# EAGLE board brick_serial_bluetooth_RN42 (EAGLE 7.4.0)
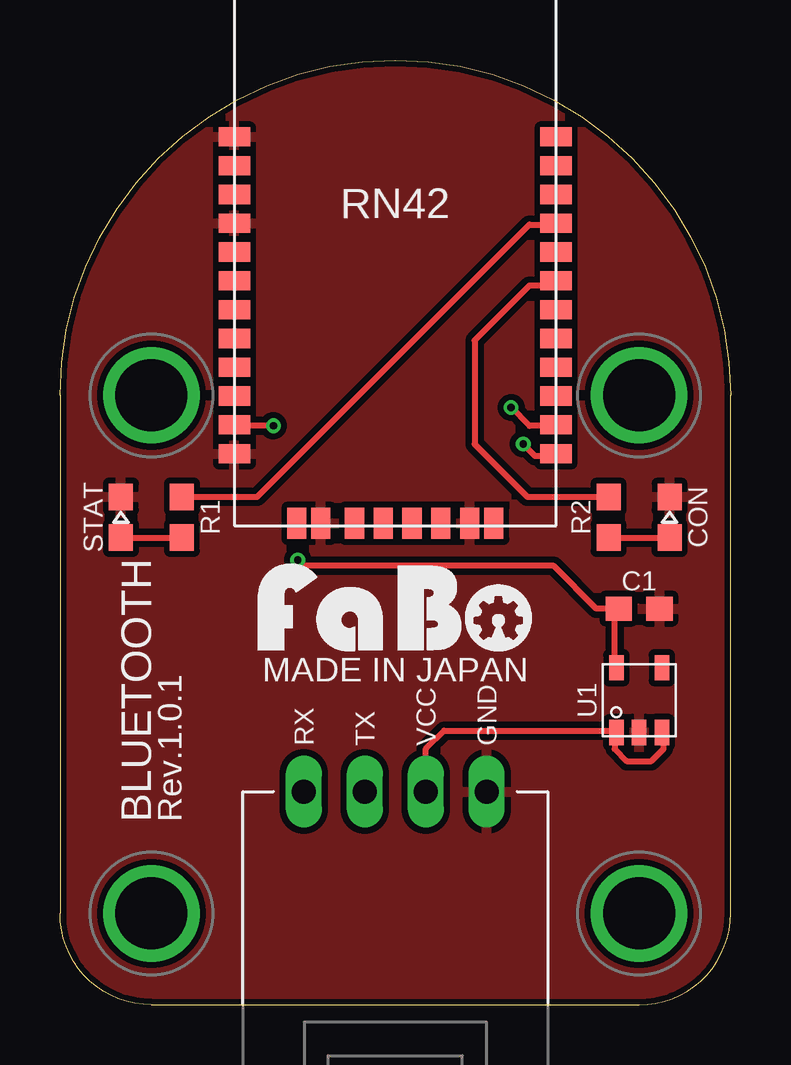
[diagram p0: board, top side]
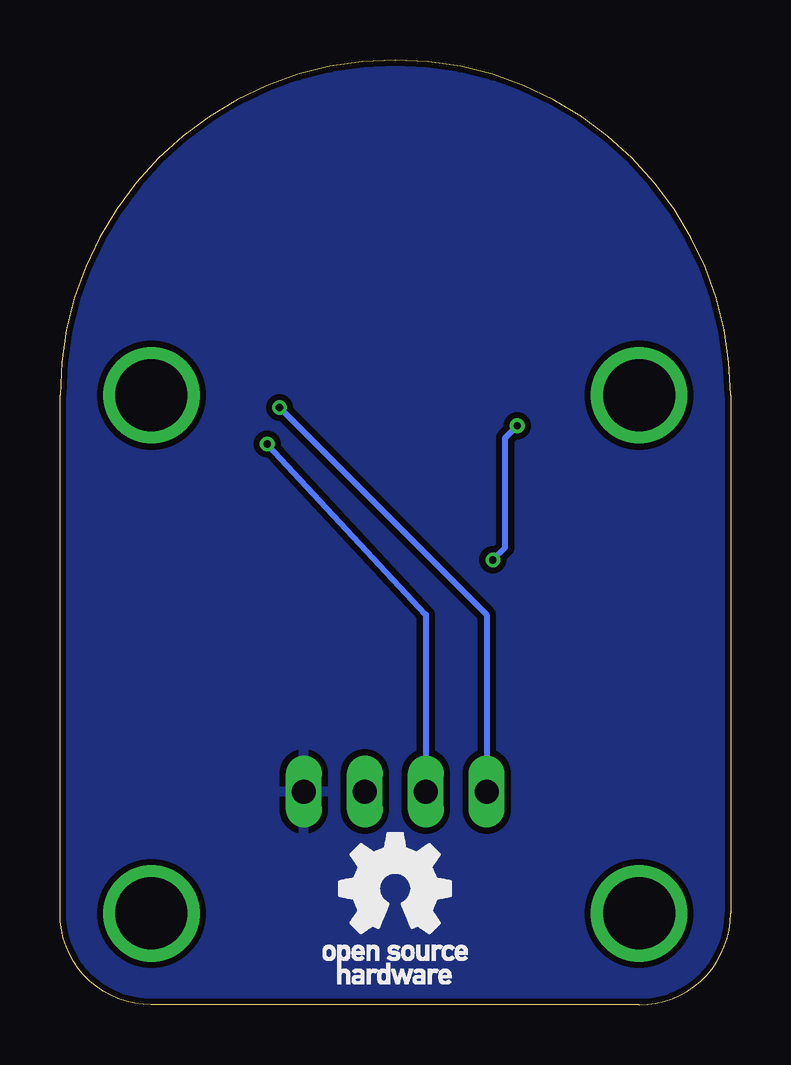
[diagram p1: board, bottom side, seen from below]

Size 27.94 x 39.37 mm. Coordinates in mm from the lower left corner, seen from the top.
Copper layers (1*16): Top 0.035mm / dielectric 1.5mm / Bottom 0.035mm
Design rules "Elecrow_2-layer_eagle_rule": minimum track width 6mil, minimum drill 12mil, track to track 6mil, track to pad 6mil, pad to pad 6mil, via to via 6mil, smd to smd 0mil, copper to edge 10mil, drill to drill 10mil, minimum pad ring 10mil, minimum via ring 6mil, stop-mask expansion 2mil, vias tented up to drill 100mil, thermal gap 10mil
Net classes: 0 default: clearance 0.254 mm

## Footprints (pad centres in the part's own frame; a part is rotated, then mirrored left to right if it is on the bottom)
EIA0603 = smd 1.1 x 1: 1 -0.85,0; 2 0.85,0
EIA0603-LED = smd 1.1 x 1: A -0.85,0; C 0.85,0
FABO_BRICK_SERIAL = drill 1 long: GND 3.81,-10.16; RX -3.81,-10.16; TX -1.27,-10.16; VCC 1.27,-10.16 | drill 3 pad 3.81: P$5 -10.16,6.35; P$6 10.16,6.35; P$7 -10.16,-15.24; P$8 10.16,-15.24
SOT_23_5 = smd 0.6 x 1.05: 1 -0.95,-1.35; 2 0,-1.35; 3 0.95,-1.35; 4 0.95,1.35; 5 -0.95,1.35
MICROCHIP-RN42 = smd 1.3 x 0.8: 1 -6.7,3.4; 2 -6.7,2.2; 3 -6.7,1; 4 -6.7,-0.2; 5 -6.7,-1.4; 6 -6.7,-2.6; 7 -6.7,-3.8; 8 -6.7,-5; 9 -6.7,-6.2; 10 -6.7,-7.4; 11 -6.7,-8.6; 12 -6.7,-9.8; 13 6.7,-9.8; 14 6.7,-8.6; 15 6.7,-7.4; 16 6.7,-6.2; 17 6.7,-5; 18 6.7,-3.8; 19 6.7,-2.6; 20 6.7,-1.4; 21 6.7,-0.2; 22 6.7,1; 23 6.7,2.2; 24 6.7,3.4 | smd 0.8 x 1.3: 28 3.1,-12.7; 29 -3.1,-12.7; 30 4.1,-12.7; 31 1.9,-12.7; 32 0.7,-12.7; 33 -0.5,-12.7; 34 -1.7,-12.7; 35 -4.1,-12.7

## Placement (x,y rotation side)
C1  1uF  [EIA0603]  24.13,16.51 0 top
CON  [EIA0603-LED]  25.4,20.32 90 top
J1  [FABO_BRICK_SERIAL]  13.97,19.05 0 top
R1  220  [EIA0603]  5.08,20.32 90 top
R2  220  [EIA0603]  22.86,20.32 90 top
STAT  [EIA0603-LED]  2.54,20.32 90 top
U1  [SOT_23_5]  24.13,12.7 0 top
U$1  MICROCHIP-RN42  [MICROCHIP-RN42]  13.97,32.77 0 top
U$3  [LOGO_FABO_M]  13.97,14.73 0 top
U$4  [LOGO_OSHW_T_M_BOTTOM]  13.97,4.83 0 top

## Library data of the parts
C1 CON R1 R2 STAT U$3 U$4 = FaBo-etc
J1 = FaBo-Template
U1 = FaBo-Supply
U$1 = FaBo-BT

## Nets
3V3: C1.1 U1.5 U$1.11
GND: C1.2 CON.C J1.GND STAT.C U1.2 U$1.1 U$1.4 U$1.12 U$1.28 U$1.29
N$1: R1.1 STAT.A
N$2: R2.2 U$1.19
N$3: R1.2 U$1.21
N$4: CON.A R2.1
N$5: J1.VCC U1.1 U1.3
RX: J1.RX U$1.14
TX: J1.TX U$1.13

## Tracks (layer width: path | path; a pad name or v marks a point on that pad's centre or on a via)
3V3  (via drill 0.3)
  Top 0.254: U1.5 23.18,14.16 23.11,14.22 23.11,16.34 | 23.11,16.34 C1.1 | 23.11,16.34 23.11,16.51 22.35,16.51 20.57,18.29 10.16,18.29 v9.91,18.54 | v8.89,24.13 7.31,24.13 U$1.11
  Bottom 0.254: v9.91,18.54 9.4,19.05 9.4,23.62 v8.89,24.13
GND
  pour Bottom: -1.27,-1.27 29.21,-1.27 29.21,40.64 -1.27,40.64
  pour Top: -1.27,-1.27 29.21,-1.27 29.21,40.64 -1.27,40.64
N$1
  Top 0.254: STAT.A R1.1
N$2
  Top 0.254: U$1.19 20.48,29.97 19.56,29.97 17.27,27.69 17.27,23.37 19.47,21.17 R2.2
N$3
  Top 0.254: R1.2 8.22,21.17 19.56,32.51 20.62,32.51 U$1.21
N$4
  Top 0.254: R2.1 CON.A
N$5
  Top 0.254: J1.VCC 15.24,10.67 16,11.43 23.1,11.43 U1.1 23.18,10.99 23.11,10.92 23.11,10.67 23.62,10.16 24.64,10.16 25.15,10.67 25.15,11.28 U1.3
RX  (via drill 0.3)
  Top 0.254: U$1.14 20.63,24.13 19.56,24.13 v18.8,24.89
  Bottom 0.254: v18.8,24.89 10.16,16.26 J1.RX
TX  (via drill 0.3)
  Top 0.254: U$1.13 20.57,22.87 20.57,22.86 19.8,22.86 v19.3,23.37
  Bottom 0.254: v19.3,23.37 12.7,16.26 J1.TX

## Text on the board
tPlace: RN42 | MADE IN JAPAN | BLUETOOTH | Rev.1.0.1